# EAGLE board Probe (EAGLE 9.5.1)
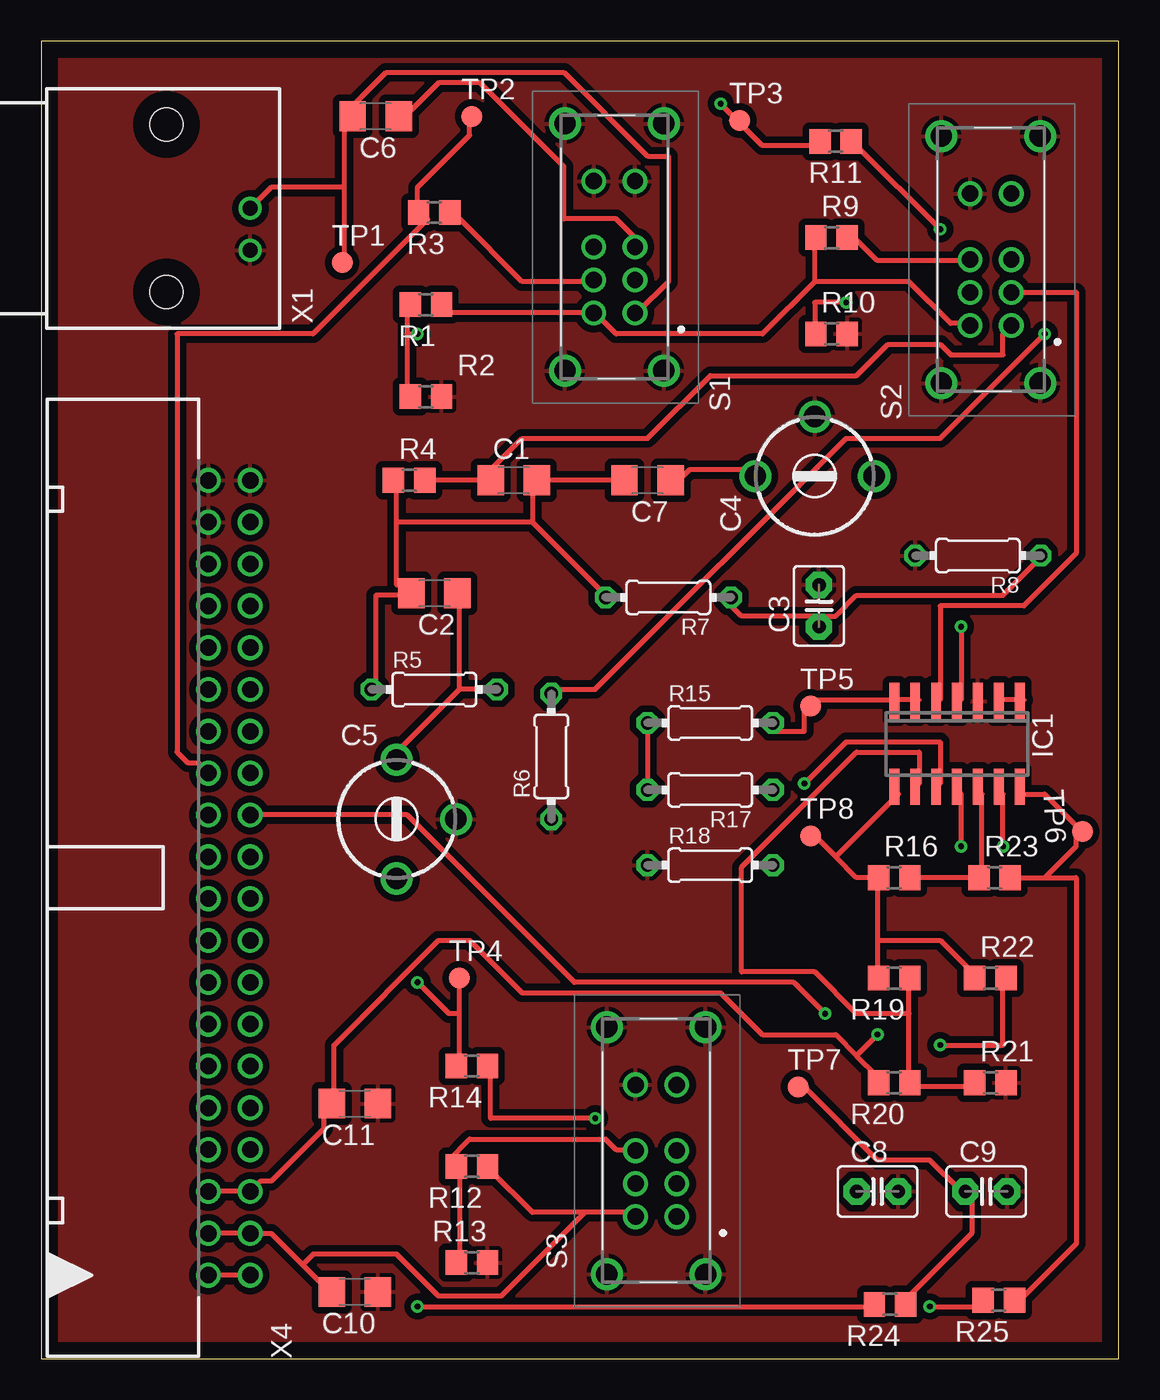
[diagram p0: board, top side]
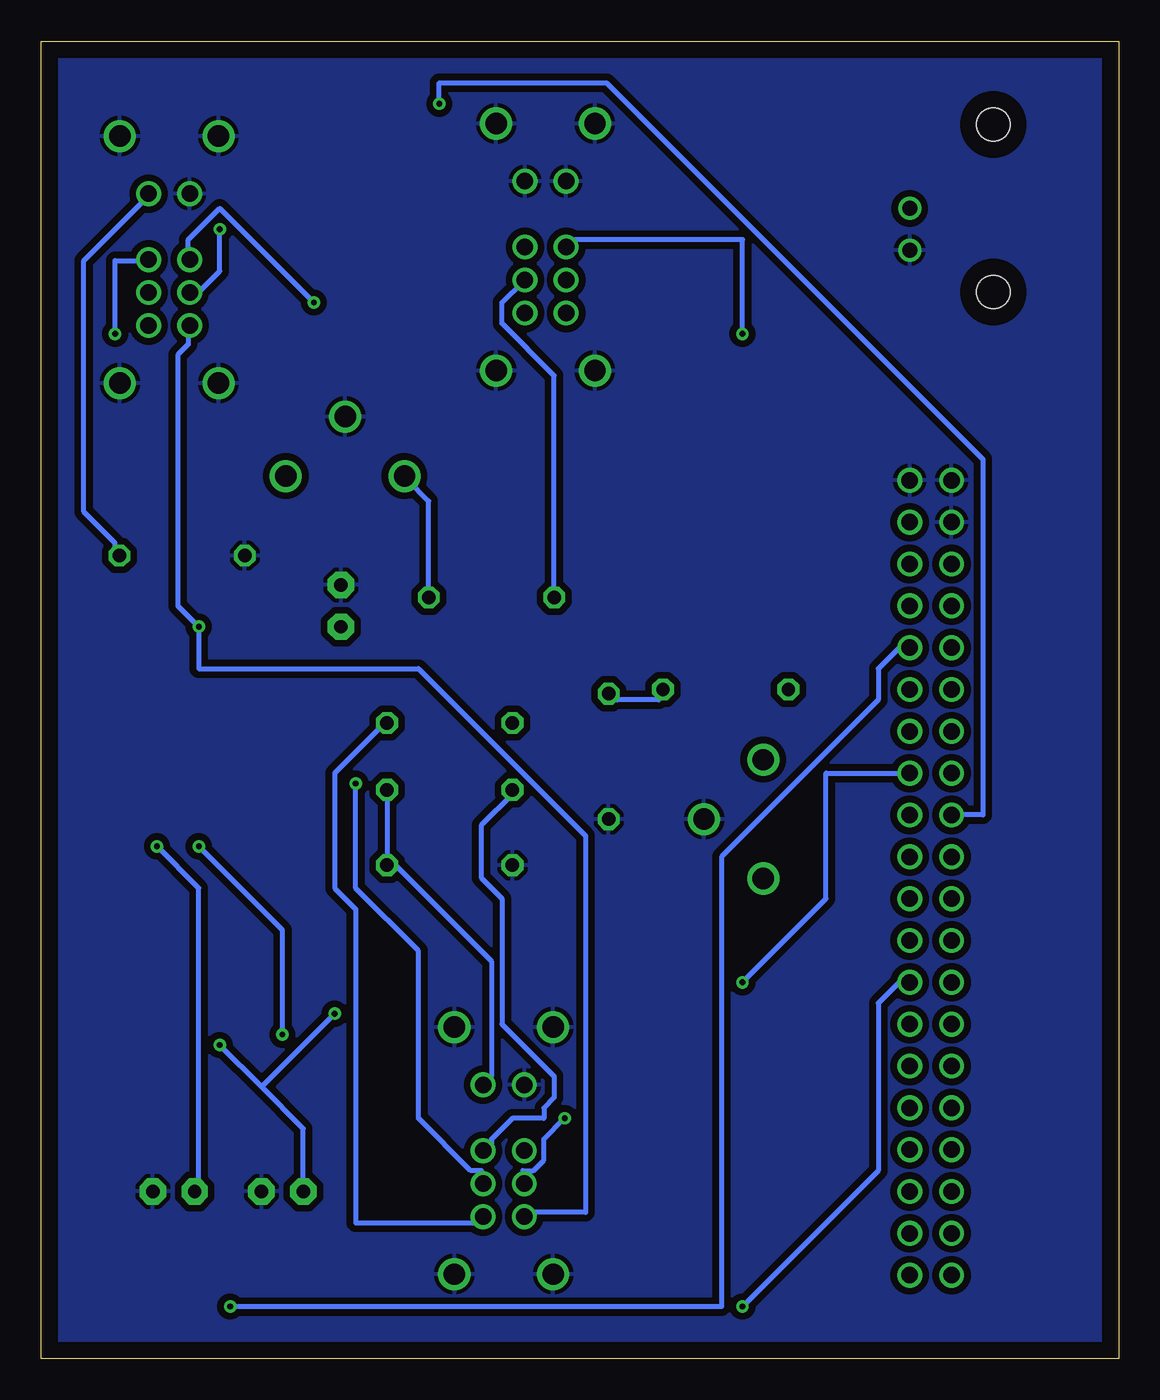
[diagram p1: board, bottom side, seen from below]

Size 65.46 x 80 mm. Coordinates in mm from the lower left corner, seen from the top.
Outline: 0,0 65.46,0 65.46,80 0,80 0,0
Copper layers (1*16): Top 0.035mm / dielectric 1.5mm / Bottom 0.035mm
Design rules "default *": minimum track width 12mil, minimum drill 0.35mm, track to track 10mil, track to pad 10mil, pad to pad 6mil, via to via 10mil, smd to smd 6mil, copper to edge 40mil, drill to drill 6mil, minimum pad ring 10mil, minimum via ring 8mil, stop-mask expansion 4mil, vias tented up to drill 0mil, thermal gap 10mil

## Footprints (pad centres in the part's own frame; a part is rotated, then mirrored left to right if it is on the bottom)
C1206 = smd 1.6 x 1.8: 1 -1.4,0; 2 1.4,0
C2.5-3 = drill 0.813 pad 1.6 octagon: 1 -1.27,0; 2 1.27,0
CTRIM808-BC = drill 1.3: 1 -3.607,0; 2 0,3.607; 3 3.607,0
SO14 = smd 0.6 x 2.2: 1 -3.81,-2.6; 2 -2.54,-2.6; 3 -1.27,-2.6; 4 0,-2.6; 5 1.27,-2.6; 6 2.54,-2.6; 7 3.81,-2.6; 8 3.81,2.6; 9 2.54,2.6; 10 1.27,2.6; 11 0,2.6; 12 -1.27,2.6; 13 -2.54,2.6; 14 -3.81,2.6
R0805 = smd 1.3 x 1.5: 1 -0.95,0; 2 0.95,0
0204/7 = drill 0.813 octagon: 1 -3.81,0; 2 3.81,0
EG2301 = drill 1 pad 1.5: 1 0,0; 2 2,0; 3 4,0; 4 8,0; 5 0,2.5; 6 2,2.5; 7 4,2.5; 8 8,2.5 | drill 1.3 pad 1.95: MH1 -3.5,4.25; MH2 11.5,4.25; MH3 -3.5,-1.75; MH4 11.5,-1.75
B1,27 = smd 1.27 x 1.27: TP 0,0
AMP_227161 = drill 0.9 pad 1.27: 1 0,-5.08; 2 -2.54,-5.08 | hole 2: -5.08,0; 5.08,0
PAK100/2500-5-40 = drill 1 pad 1.422: 1 -24.13,-1.27; 2 -24.13,1.27; 3 -21.59,-1.27; 4 -21.59,1.27; 5 -19.05,-1.27; 6 -19.05,1.27; 7 -16.51,-1.27; 8 -16.51,1.27; 9 -13.97,-1.27; 10 -13.97,1.27; 11 -11.43,-1.27; 12 -11.43,1.27; 13 -8.89,-1.27; 14 -8.89,1.27; 15 -6.35,-1.27; 16 -6.35,1.27; 17 -3.81,-1.27; 18 -3.81,1.27; 19 -1.27,-1.27; 20 -1.27,1.27; 21 1.27,-1.27; 22 1.27,1.27; 23 3.81,-1.27; 24 3.81,1.27; 25 6.35,-1.27; 26 6.35,1.27; 27 8.89,-1.27; 28 8.89,1.27; 29 11.43,-1.27; 30 11.43,1.27; 31 13.97,-1.27; 32 13.97,1.27; 33 16.51,-1.27; 34 16.51,1.27; 35 19.05,-1.27; 36 19.05,1.27; 37 21.59,-1.27; 38 21.59,1.27; 39 24.13,-1.27; 40 24.13,1.27

## Placement (x,y rotation side)
C1  220pF  [C1206]  28.7,53.34 0 top
C2  3pF  [C1206]  23.88,46.48 180 top
C3  120pF  [C2.5-3]  47.24,45.72 90 top
C4  30pF  [CTRIM808-BC]  46.99,53.59 0 top
C5  30pF  [CTRIM808-BC]  21.59,32.77 270 top
C6  0.1u  [C1206]  20.32,75.44 180 top
C7  1pF  [C1206]  36.83,53.34 180 top
C8  120pF  [C2.5-3]  50.8,10.16 0 top
C9  0.1u  [C2.5-3]  57.4,10.16 0 top
C10  0.1uF  [C1206]  19.05,4.06 180 top
C11  0.1uF  [C1206]  19.05,15.49 180 top
IC1  TL084D  [SO14]  55.63,37.34 180 top
R1  10K  [R0805]  23.37,64.01 180 top
R2  3.3K  [R0805]  23.37,58.42 0 top
R3  1.5K  [R0805]  23.88,69.6 180 top
R4  100K  [R0805]  22.35,53.34 0 top
R5  1.8M 1%  [0204/7]  23.88,40.64 0 top
R6  200K 1%  [0204/7]  30.99,36.58 90 top
R7  2M 1%  [0204/7]  38.1,46.23 180 top
R8  20K 1%  [0204/7]  56.9,48.77 180 top
R9  10K  [R0805]  48.01,68.07 0 top
R10  3.3K  [R0805]  48.01,62.23 0 top
R11  1.5K  [R0805]  48.26,73.91 180 top
R12  10K  [R0805]  26.16,11.68 180 top
R13  3.3K  [R0805]  26.16,5.84 0 top
R14  1.5K  [R0805]  26.16,17.78 180 top
R15  300E  [0204/7]  40.64,38.61 0 top
R16  120e  [R0805]  51.82,29.21 0 top
R17  180E  [0204/7]  40.64,34.54 180 top
R18  120E  [0204/7]  40.64,29.97 0 top
R19  1K  [R0805]  51.82,23.11 180 top
R20  3K  [R0805]  51.82,16.76 180 top
R21  150E  [R0805]  57.66,16.76 0 top
R22  120E  [R0805]  57.66,23.11 0 top
R23  100k  [R0805]  57.91,29.21 0 top
R24  100K  [R0805]  51.56,3.3 180 top
R25  1k  [R0805]  58.17,3.56 180 top
S1  DC-AC-GND  [EG2301]  36.07,63.5 90 top
S2  EG2301  [EG2301]  58.93,62.74 90 top
S3  EG2301  [EG2301]  38.61,8.64 90 top
TP1  TPB1,27  [B1,27]  18.29,66.55 0 top
TP2  TPB1,27  [B1,27]  26.16,75.44 0 top
TP3  TPB1,27  [B1,27]  42.42,75.18 0 top
TP4  TPB1,27  [B1,27]  25.4,23.11 0 top
TP5  TPB1,27  [B1,27]  46.74,39.62 0 top
TP6  TPB1,27  [B1,27]  63.25,32 92.6 top
TP7  TPB1,27  [B1,27]  45.97,16.51 0 top
TP8  TPB1,27  [B1,27]  46.74,31.75 0 top
X1  1-227161-0  [AMP_227161]  7.62,69.85 90 top
X4  2540-5  [PAK100/2500-5-40]  11.43,29.21 90 top

## Library data of the parts
C1 C2 C4-C7 C10 C11 = rcl; SPICEPREFIX: C
C3 C8 C9 = capacitor-wima
IC1 = linear; SPICEPREFIX: X
R1-R25 = rcl; SPICEPREFIX: R
S1-S3 = SamacSys_Parts; DESCRIPTION: Slide Switches DP3T PC MNT SLIDE; HEIGHT: 11mm; MANUFACTURER_NAME: E-Switch; MANUFACTURER_PART_NUMBER: EG2301; MOUSER_PART_NUMBER: 612-EG2301; MOUSER_PRICE-STOCK: https://www.mouser.co.uk/ProductDetail/E-Switch/EG2301?qs=6C6BR4UgC3MjpdLgLKoVKg%3D%3D
TP1-TP8 = testpad
X1 = con-coax; MF: TYCO ELECTRONICS; MPN: 1-227161; OC_FARNELL: unknown; OC_NEWARK: 33B3200
X4 = con-3m; OC_FARNELL: 9838414; OC_NEWARK: unknown

## Nets
+3V3: X4.1 X4.2
+5V: C10.2 IC1.4 R1.1 R9.1 R12.1 S1.5 S2.5 S3.5 X4.3 X4.4
-5V: C11.2 IC1.11 R20.2 X4.5 X4.6
ADCIN: C8.1 R22.2 X4.23
ADCIN2: X4.27
ADCIN3: X4.28
BTN1: X4.22
BTN2: X4.21
BTN3: X4.20
BTN4: X4.19
CPLSEL: R3.2 TP2.TP X4.26
DB0: X4.7
DB1: X4.8
DB2: X4.9
DB3: X4.10
DB4: X4.11
DB5: X4.12
DB6: X4.13
DB7: X4.14
GND: C3.2 C4.2 C5.2 C8.2 C9.2 C10.1 C11.1 IC1.3 R2.2 R6.1 R8.2 R10.2 R13.2 R18.1 R21.2 S1.4 S1.8 S1.MH1 S1.MH2 S1.MH3 S1.MH4 S2.8 S2.MH1 S2.MH2 S2.MH3 S2.MH4 S3.8 S3.MH1 S3.MH2 S3.MH3 S3.MH4 X1.2 X4.38 X4.39 X4.40
LCD_NRD: X4.17
LCD_NRESET: X4.18
N$1: C6.2 S1.1 TP1.TP X1.1
N$2: C6.1 S1.3
N$3: R3.1 S1.6
N$4: R1.2 R2.1 S1.7
N$5: C1.2 C2.2 C7.2 R4.1 R5.1 R7.2 S1.2
N$6: C3.1 C4.1 C7.1 R7.1 R8.1 S2.4
N$7: C1.1 R4.2 S2.1
N$8: C2.1 C5.1 R5.2 R6.2 S2.3
N$9: IC1.5 S2.2
N$10: R15.1 R17.2 S3.3
N$11: R9.2 R10.1 S2.7
N$12: R11.1 S2.6
N$13: R12.2 R13.1 S3.7
N$14: R14.1 S3.6
N$16: IC1.10 S3.2
N$17: R17.1 R18.2 S3.4
N$18: IC1.6 IC1.7 R15.2 S3.1 TP5.TP
N$20: IC1.9 R19.1 R20.1 R21.1
N$21: IC1.1 IC1.2
N$22: IC1.12 R16.2 R23.1
N$23: IC1.8 R16.1 R19.2 R22.1 TP8.TP
N$24: C9.1 IC1.13 R24.1 TP7.TP
N&123: IC1.14 R23.2 R25.1 TP6.TP
RX1: X4.33
SWCLK: X4.37
SWDIO: X4.36
TESTSIG: X4.30
TL_PWM: R24.2 X4.15
TRIG: R25.2 X4.31
TX1: X4.32
USBDM: X4.34
USBDP: X4.35
V-MON: X4.29
VGEN: X4.16
VSENSEL1: R11.2 TP3.TP X4.24
VSENSEL2: R14.2 TP4.TP X4.25

## Tracks (layer width: path | path; a pad name or v marks a point on that pad's centre or on a via)
+3V3
  Top 0.305: X4.1 X4.2
+5V  (via drill 0.35)
  Top 0.305: 15.88,5.71 13.97,7.62 X4.3 X4.4 | 15.88,5.71 17.14,4.45 C10.2 | 33.02,8.89 35.56,8.89 S3.5 | 33.02,8.89 29.84,8.89 27.3,11.43 R12.1 | 15.88,5.71 16.51,6.35 21.59,6.35 24.13,3.81 27.94,3.81 33.02,8.89 | R1.1 24.77,63.5 S1.5 33.66,63.5 34.92,62.23 43.81,62.23 46.99,65.41 | 46.99,65.41 46.99,67.94 R9.1 | 46.99,65.41 52.7,65.41 55.24,62.87 55.88,62.87 S2.5 | v55.88,44.45 55.88,40.01 IC1.4
  Bottom 0.305: S2.5 56.52,62.23 56.52,61.59 57.15,60.96 57.15,45.72 v55.88,44.45 55.88,41.91 42.55,41.91 32.38,31.75 32.38,8.89 35.56,8.89 S3.5
-5V  (via drill 0.35)
  Top 0.305: X4.6 X4.5 13.34,10.79 13.97,10.79 17.14,13.97 17.14,15.24 C11.2 17.78,15.88 17.78,19.05 24.13,25.4 26.04,25.4 29.21,22.23 41.27,22.23 43.81,19.68 48.26,19.68 49.53,18.41 | 49.53,18.41 50.8,17.14 R20.2 | v55.88,31.11 55.88,34.29 IC1.11 | 49.53,18.41 v50.8,19.68
  Bottom 0.305: v55.88,31.11 50.8,26.04 v50.8,19.68
ADCIN  (via drill 0.35)
  Top 0.305: v54.61,19.05 58.42,19.05 58.42,22.86 R22.2 | X4.23 22.23,33.02 32.38,22.86 45.72,22.86 v47.62,20.95
  Bottom 0.305: 52.07,16.51 49.53,13.97 C8.1 | 52.07,16.51 v54.61,19.05 | 52.07,16.51 v47.62,20.95
CPLSEL
  Top 0.305: TP2.TP 26.04,74.93 26.04,74.3 22.86,71.12 22.86,69.85 R3.2 23.5,69.22 16.51,62.23 8.26,62.23 8.26,36.83 8.89,36.2 9.53,36.2 X4.26
GND
  pour Top (isolate 0.406): 0.25,80.01 0.25,0 65.53,0 65.53,80.01 0.51,80.01 0.25,80.26
  pour Bottom (isolate 0.406): 0,80.01 0,0 65.53,0 65.53,80.01
N$1
  Top 0.305: 18.41,71.12 18.41,74.93 C6.2 18.41,75.56 20.95,78.11 31.75,78.11 36.83,73.03 38.1,73.03 38.1,65.41 36.2,63.5 S1.1 | 18.41,71.12 18.41,66.67 TP1.TP | X1.1 13.97,71.12 18.41,71.12
N$2
  Top 0.305: C6.1 22.23,75.56 24.13,77.47 26.67,77.47 31.75,72.39 31.75,69.22 34.92,69.22 36.2,67.94 S1.3
N$3
  Top 0.305: R3.1 25.4,69.22 29.21,65.41 33.02,65.41 S1.6
N$4  (via drill 0.35)
  Top 0.305: 22.23,62.23 22.23,63.5 R1.2 | 22.23,62.23 22.23,58.42 R2.1 | 22.23,62.23 v22.86,62.23
  Bottom 0.305: v22.86,62.23 22.86,67.94 33.02,67.94 S1.7
N$5
  Top 0.305: 21.59,50.8 21.59,46.99 22.23,46.99 C2.2 22.23,46.35 20.32,46.35 20.32,40.64 R5.1 | 21.59,50.8 21.59,53.34 R4.1 | C7.2 C1.2 29.84,53.34 29.84,50.8 | 29.84,50.8 34.29,46.35 R7.2 | 29.84,50.8 21.59,50.8
  Bottom 0.305: R7.2 34.29,59.69 37.47,62.87 37.47,64.14 36.2,65.41 S1.2
N$6
  Top 0.305: C7.1 38.73,53.34 39.37,53.98 43.18,53.98 C4.1 | 46.99,45.09 42.55,45.09 41.91,45.72 R7.1 | 46.99,45.09 47.62,44.45 C3.1 46.99,45.09 | 46.99,45.09 48.26,45.09 49.53,46.35 58.42,46.35 60.33,48.26 R8.1
  Bottom 0.305: S2.4 59.05,70.48 62.87,66.67 62.87,51.44 60.96,49.53 60.96,48.9 R8.1 | R7.1 41.91,52.07 43.18,53.34 C4.1
N$7
  Top 0.305: 26.67,53.34 R4.2 | 26.67,53.34 29.21,55.88 36.83,55.88 40.64,59.69 49.53,59.69 51.44,61.59 54.61,61.59 55.24,60.96 58.42,60.96 58.42,62.23 S2.1 | 26.67,53.34 C1.1
N$8  (via drill 0.35)
  Top 0.305: 25.4,40.64 25.4,46.35 C2.1 | R5.2 25.4,40.64 | v60.96,62.23 54.61,55.88 48.9,55.88 33.66,40.64 31.11,40.64 R6.2 | 25.4,40.64 21.59,36.83 C5.1
  Bottom 0.305: R6.2 30.48,40.01 27.94,40.01 27.94,40.64 R5.2 | v60.96,62.23 60.96,66.67 59.05,66.67 S2.3
N$9
  Top 0.305: IC1.5 54.61,40.01 54.61,45.72 59.69,45.72 62.87,48.9 62.87,64.77 59.05,64.77 S2.2
N$10
  Top 0.305: R15.1 R17.2
  Bottom 0.305: S3.3 38.1,12.7 38.1,13.34 36.83,14.61 34.92,14.61 34.92,15.24 34.29,15.88 34.29,17.14 37.47,20.32 37.47,27.94 38.73,29.21 38.73,32.38 36.83,34.29 R17.2
N$11  (via drill 0.35)
  Top 0.305: v48.9,64.14 46.99,64.14 46.99,62.23 R10.1 | R9.2 49.53,67.94 50.8,66.67 55.88,66.67 S2.7
  Bottom 0.305: v48.9,64.14 54.61,69.85 56.52,67.94 56.52,67.31 S2.7
N$12  (via drill 0.35)
  Top 0.305: v54.61,68.58 49.53,73.66 R11.1
  Bottom 0.305: v54.61,68.58 54.61,66.04 55.88,64.77 S2.6
N$13
  Top 0.305: R13.1 25.4,6.35 25.4,11.43 R12.2 24.77,12.06 26.04,13.34 34.29,13.34 34.92,12.7 35.56,12.7 S3.7
N$14  (via drill 0.35)
  Top 0.305: v33.66,14.61 27.3,14.61 27.3,17.78 R14.1
  Bottom 0.305: v33.66,14.61 34.92,13.34 34.92,12.06 35.56,11.43 36.2,11.43 36.2,10.79 S3.6
N$16  (via drill 0.35)
  Top 0.305: v46.35,34.92 48.9,37.47 54.61,37.47 54.61,34.92 IC1.10
  Bottom 0.305: v46.35,34.92 46.35,28.57 42.55,24.77 42.55,14.61 39.37,11.43 38.73,11.43 38.73,10.79 S3.2
N$17
  Bottom 0.305: R17.1 44.45,30.48 | 44.45,30.48 38.1,24.13 38.1,17.14 S3.4 | 44.45,30.48 R18.2
N$18
  Top 0.305: 52.07,40.01 53.34,40.01 IC1.6 | R15.2 44.45,38.1 46.35,38.1 46.35,39.37 TP5.TP 46.99,40.01 52.07,40.01 | 52.07,40.01 IC1.7
  Bottom 0.305: S3.1 38.73,8.26 46.35,8.26 46.35,27.3 47.62,28.57 47.62,35.56 44.45,38.73 R15.2
N$20
  Top 0.305: R21.1 56.52,16.51 53.34,16.51 R20.1 52.7,17.14 52.7,20.95 | 52.7,20.95 52.7,22.86 R19.1 | 52.7,20.95 49.53,20.95 46.99,23.5 42.55,23.5 42.55,29.84 49.53,36.83 53.34,36.83 53.34,34.92 IC1.9
N$21
  Top 0.305: IC1.2 58.42,40.01 59.69,40.01 IC1.1
N$22
  Top 0.305: R16.2 R23.1 57.15,29.21 57.15,34.29 IC1.12
N$23
  Top 0.305: 48.26,30.48 49.53,29.21 50.8,29.21 | 48.26,30.48 46.99,31.75 TP8.TP | 50.8,29.21 50.8,25.4 | 50.8,25.4 50.8,23.5 R19.2 | 50.8,29.21 R16.1 | 50.8,25.4 54.61,25.4 56.52,23.5 R22.1 | 48.26,30.48 52.07,34.29 IC1.8
N$24  (via drill 0.35)
  Top 0.305: TP7.TP 46.35,16.51 50.8,12.06 53.98,12.06 55.88,10.16 C9.1 56.52,10.16 56.52,7.62 52.7,3.81 R24.1 | v58.42,31.11 58.42,34.29 IC1.13
  Bottom 0.305: v58.42,31.11 55.88,28.57 55.88,10.16 C9.1
N&123
  Top 0.305: IC1.14 59.69,34.29 60.96,34.29 TP6.TP 62.87,31.75 62.87,31.11 60.96,29.21 | R23.2 60.96,29.21 | 60.96,29.21 62.87,29.21 62.87,6.99 59.69,3.81 R25.1
TL_PWM  (via drill 0.35)
  Top 0.305: v22.86,3.17 50.16,3.17 R24.2
  Bottom 0.305: v22.86,3.17 14.61,11.43 14.61,21.59 13.34,22.86 X4.15
TRIG  (via drill 0.35)
  Top 0.305: v53.98,3.17 57.15,3.17 R25.2
  Bottom 0.305: v53.98,3.17 24.13,3.17 24.13,30.48 14.61,40.01 14.61,41.91 13.34,43.18 X4.31
VSENSEL1  (via drill 0.35)
  Top 0.305: R11.2 46.99,73.66 43.81,73.66 42.55,74.93 TP3.TP 41.91,75.56 v41.27,76.2
  Bottom 0.305: X4.24 8.26,33.02 8.26,54.61 31.11,77.47 41.27,77.47 v41.27,76.2
VSENSEL2  (via drill 0.35)
  Top 0.305: 25.4,20.95 25.4,17.78 R14.2 | 25.4,20.95 TP4.TP | v22.86,22.86 24.77,20.95 25.4,20.95
  Bottom 0.305: X4.25 17.78,35.56 17.78,27.94 v22.86,22.86